# Altium PCB MicroerMouse.PcbDoc (part 1 of 2)
Units mm, origin at the board's own origin, x right, y up, seen from the top; angles counter-clockwise.
Board outline 87.5 x 72 mm, 2 copper layers (Top Layer, Bottom Layer); 98 components, 71 nets, 347 pads, 248 vias.
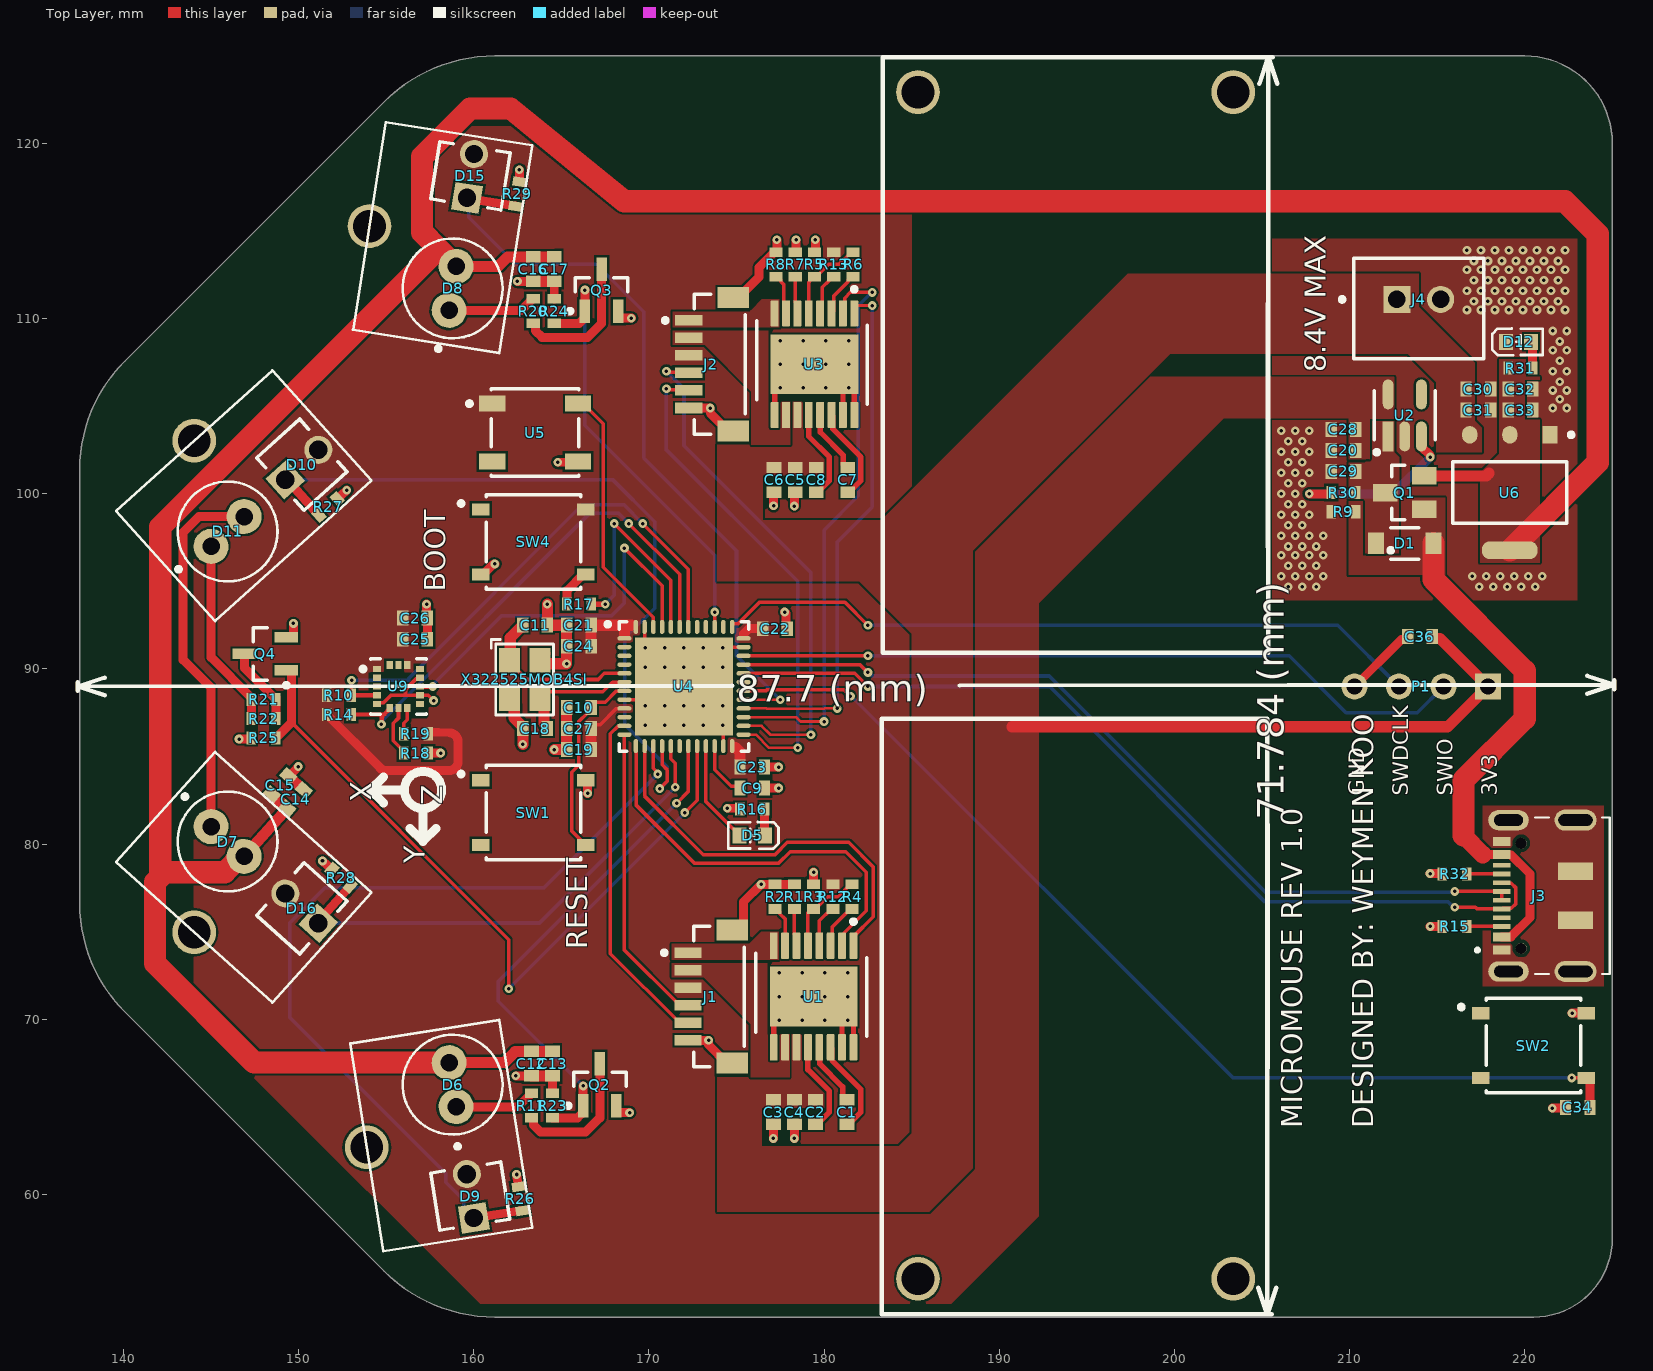
[diagram p0: Top Layer view]
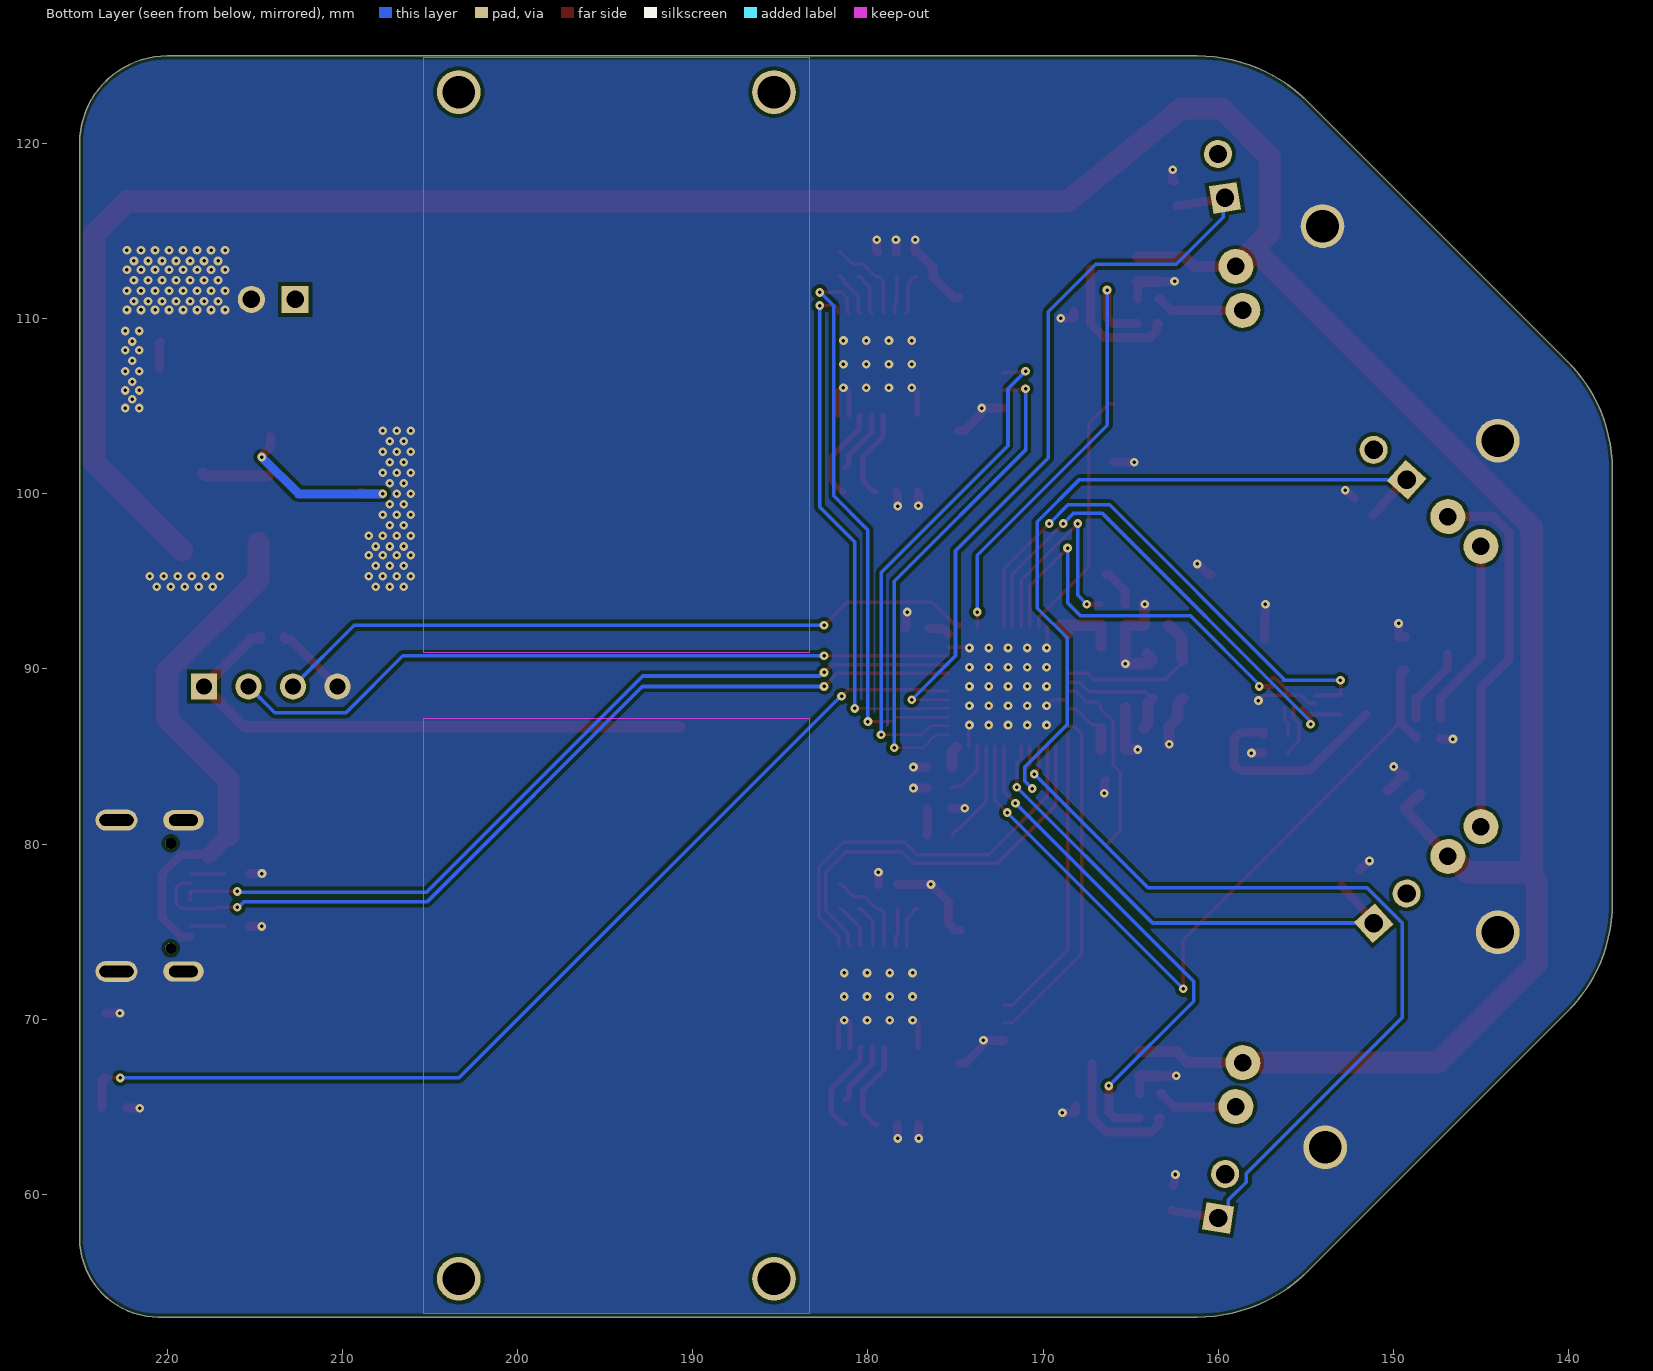
[diagram p1: Bottom Layer view, seen from below]

## Layer stack, top to bottom
Top Solder: solder mask 0.0102, Solder Resist, Dk 3.5
Top Layer: signal copper 0.0356
Dielectric 1: dielectric 0.32, FR-4, Dk 4.8
Bottom Layer: signal copper 0.0356
Bottom Solder: solder mask 0.0102, Solder Resist, Dk 3.5

## Board outline
225,120 225,57.5 cw(c220.5,57.5) 220.5,53 161.208,53 cw(c161.208,61.952) 154.878,55.622 140.061,70.439 cw(c146.243,76.621) 137.5,76.621 137.5,101.379 cw(c146.243,101.379) 140.061,107.561 154.878,122.378 cw(c161.208,116.048) 161.208,125 220,125 cw(c220,120)

## Design rules (kind name [scope] priority, off if disabled: settings)
BoardOutlineClearance [All] p1: gap=0.2 ignorepadtopadclearanceinfootprint=FALSE except(0.4: Arc-SplitBarrior Arc-SplitContinuation Track-SplitBarrior Track-SplitContinuation SMDPad-SplitBarrior SMDPad-SplitContinuation THPad-SplitBarrior THPad-SplitContinuation Via-SplitBarrior Via-SplitContinuation Fill-SplitBarrior Fill-SplitContinuation Poly-SplitBarrior Poly-SplitContinuation Region-SplitBarrior Region-SplitContinuation Text-SplitBarrior Text-SplitContinuation)
Clearance "Clearance Bottom Layer" [OnLayer('Bottom Layer')] p1: gap=0.203 ignorepadtopadclearanceinfootprint=TRUE except(0.076: Arc-SMDPad Track-SMDPad SMDPad-SMDPad; 0.254: Arc-Text Track-Text SMDPad-Text THPad-Text Via-Text Fill-Text Poly-Text Region-Text Text-Text)
Clearance "Clearance Top Layer" [OnLayer('Top Layer')] p2: gap=0.127 ignorepadtopadclearanceinfootprint=TRUE except(0.076: Arc-SMDPad Track-SMDPad SMDPad-SMDPad; 0.203: Arc-Arc Arc-Track Arc-THPad Arc-Via Arc-Hole Track-Track Track-THPad Track-Via Track-Hole SMDPad-THPad SMDPad-Via SMDPad-Hole THPad-THPad THPad-Via THPad-Hole Via-Via Via-Hole Fill-Hole Poly-Hole Region-Hole Text-Hole; 0.254: Arc-Text Track-Text SMDPad-Text THPad-Text Via-Text Fill-Text Poly-Text Region-Text Text-Text)
Clearance [All] p3: gap=0.2 ignorepadtopadclearanceinfootprint=FALSE except(0.076: Arc-SMDPad Track-SMDPad SMDPad-SMDPad; 0.089: Arc-Arc Arc-Track Track-Track; 0.127: Arc-Via Track-Via SMDPad-Via THPad-Via Via-Via; 0.254: Arc-Text Track-Text SMDPad-Text THPad-Text Via-Text Fill-Text Poly-Text Region-Text Text-Text)
DiffPairsRouting [All] p1: maxlimit=0.254 minlimit=0.127 mostfreqgap=0.203 toplayer_minwidth=0.254 toplayer_maxwidth=0.381 toplayer_prefwidth=0.254 bottomlayer_minwidth=0.254 bottomlayer_maxwidth=0.381 bottomlayer_prefwidth=0.254 maxuncoupledlength=12.7
HoleSize [All] p1: absolutevalues=TRUE maxlimit=6.3 minlimit=0.2 maxpercent=80.000 minpercent=20.000
MinimumAnnularRing [All] p1: minimumring=0.076
MinimumSolderMaskSliver [All] p1: minsoldermaskwidth=0.018
PolygonConnect PolygonConnect_1 [All] p1: connectstyle=Direct reliefconductorwidth=0.508 reliefentries=4 polygonreliefangle="90 Angle" airgapwidth=0.254
RoutingCorners [All] p1: cornerstyle=Round minsetback=2.54 maxsetback=2.54
RoutingVias [All] p1: holewidth=0.5 width=1 viastyle="Through Hole" minholewidth=0.2 minwidth=0.45 maxholewidth=1 maxwidth=2
SilkToSilkClearance [All] p1: silktosilkclearance=0.025
SilkToSolderMaskClearance [IsPad] p1: minsilkscreentomaskgap=0.025 clearancetoexposedcopper=TRUE
SolderMaskExpansion [All] p1: expansion=0.102 istentingtop=FALSE
Width [All] p1: maxlimit=2.54 minlimit=0.089 preferedwidth=0.381
24 further rules are at their usual default settings.

## Classes and differential pairs
net class USB: MCU_USB_D_N MCU_USB_D_P NetU4_31
differential pair MCU_USB_D: +MCU_USB_D_P -MCU_USB_D_N

## Components (designator, comment, footprint, x,y, rotation, side; value= is the part's Value field where it differs from the comment)
C1 "0.022uF" "IPC C C0603 No Silk" 181.3,64.7 r90 top value=?F
C2 "0.1uF" "IPC C C0603 No Silk" 179.5,64.7 r270 top value=?F
C3 "4.7uF" "IPC C C0603 No Silk" 177.1,64.7 r270 top value=?F
C4 "0.1uF" "IPC C C0603 No Silk" 178.3,64.7 r270 top value=?F
C5 "4.7uF" "IPC C C0603 No Silk" 178.35,100.8 r270 top value=?F
C6 "0.1uF" "IPC C C0603 No Silk" 177.15,100.8 r270 top value=?F
C7 "0.022uF" "IPC C C0603 No Silk" 181.35,100.8 r90 top value=?F
C8 "0.1uF" "IPC C C0603 No Silk" 179.55,100.8 r270 top value=?F
C9 "2.2uF" "IPC C C0603 No Silk" 175.9,83.2 r180 top value=?F
C10 "100nF" "IPC C C0603 No Silk" 166,87.8 r180 top value=?F
C11 "15pF" "IPC C C0603 No Silk" 163.5,92.5 r0 top value=?F
C12 "100nF" "IPC C C0603 No Silk" 163.294,67.47 r90 top value=?F
C13 "4.7uF" "IPC C C0603 No Silk" 164.494,67.47 r90 top value=?F
C14 "100nF" "IPC C C0603 No Silk" 149.832,82.57 r228 top value=?F
C15 "4.7uF" "IPC C C0603 No Silk" 148.941,83.372 r228 top value=?F
C16 "100nF" "IPC C C0603 No Silk" 163.394,112.83 r90 top value=?F
C17 "4.7uF" "IPC C C0603 No Silk" 164.594,112.83 r90 top value=?F
C18 "15pF" "IPC C C0603 No Silk" 163.5,86.6 r180 top value=?F
C19 "2.2uF" "IPC C C0603 No Silk" 166,85.4 r0 top value=?F
C20 "10uF" "IPC C C0603 No Silk" 209.65,102.475 r0 top value=?F
C21 "100nF" "IPC C C0603 No Silk" 166,92.5 r180 top value=?F
C22 "100nF" "IPC C C0603 No Silk" 177.2,92.3 r0 top value=?F
C23 "100nF" "IPC C C0603 No Silk" 175.9,84.4 r0 top value=?F
C24 "100nF" "IPC C C0603 No Silk" 166,91.3 r180 top value=?F
C25 "10uF" "IPC C C0603 No Silk" 156.65,91.7 r0 top value=?F
C26 "100nF" "IPC C C0603 No Silk" 156.65,92.9 r0 top value=?F
C27 "100nF" "IPC C C0603 No Silk" 166,86.6 r180 top value=?F
C28 "1uF" "IPC C C0603 No Silk" 209.65,103.675 r0 top value=?F
C29 "10uF" "IPC C C0603 No Silk" 209.65,101.275 r0 top value=?F
C30 "10uF" "IPC C C0603 No Silk" 217.35,105.975 r0 top value=?F
C31 "100nF" "IPC C C0603 No Silk" 217.35,104.775 r0 top value=?F
C32 "10uF" "IPC C C0603 No Silk" 219.75,105.975 r0 top value=?F
C33 "100nF" "IPC C C0603 No Silk" 219.75,104.775 r0 top value=?F
C34 "100nF" "IPC C C0603 No Silk" 223.025,64.975 r180 top value=?F
C36 "100nF" "IPC C C0603 No Silk" 214.015,91.85 r180 top value=?F
D1 "MBR0540" FP-425-04-MFG 213.15,97.175 r0 top
D5 "LED" LED0603-FD_BLUE 175.9,80.5 r0 top
D6 "SFH 4545" FP-SFH_4556-MFG 158.794,66.27 r99 top
D7 "SFH 4545" FP-SFH_4556-MFG 145.944,80.15 r318 top
D8 "SFH 4545" FP-SFH_4556-MFG 158.794,111.73 r81 top
D9 "TEFT4300" FP-6_544-5269_01-4-MFG 159.801,59.909 r99 top
D10 "TEFT4300" FP-6_544-5269_01-4-MFG 150.18,101.664 r42 top
D11 "SFH 4545" FP-SFH_4556-MFG 145.944,97.85 r42 top
D12 "LED" LED0603-FD_BLUE 219.65,108.675 r180 top
D15 "TEFT4300" FP-6_544-5269_01-4-MFG 159.811,118.15 r81 top
D16 "TEFT4300" FP-6_544-5269_01-4-MFG 150.183,76.333 r138 top
J1 "BM06B-SRSS-TBT(LF)(SN)" FP-BM06B-SRSS-TBT_LF_SN-MFG 174,71.3 r270 top
J2 "BM06B-SRSS-TBT(LF)(SN)" FP-BM06B-SRSS-TBT_LF_SN-MFG 174.05,107.4 r270 top
J3 "DX07S016JA1R1500" JAE_DX07S016JA1R1500 219.8,77.05 r90 top
J4 "B2B-XH-A(LF)(SN)" FP-B2B-XH-A_LF_SN-MFG 213.95,110.575 r0 top
P1 "Header 4H" HDR1X4H 217.9,89 r180 top
Q1 "FDV304P" FAIR-SOT23-3_V 213.15,100.075 r180 top
Q2 "2N7002" INF-PG-SOT23_M 167.194,66.27 r90 top
Q3 "2N7002" INF-PG-SOT23_M 167.294,111.63 r90 top
Q4 "2N7002" INF-PG-SOT23_M 148.1,90.865 r180 top
R1 "2.49k" "IPC C R0603 No Silk" 178.3,77 r270 top value=?
R2 "20k" "IPC C R0603 No Silk" 177.2,77 r270 top value=?
R3 "0" "IPC C R0603 No Silk" 179.4,77 r90 top value=?
R4 "10k" "IPC C R0603 No Silk" 181.6,77 r90 top value=?
R5 "0" "IPC C R0603 No Silk" 179.45,113.1 r90 top value=?
R6 "10k" "IPC C R0603 No Silk" 181.65,113.1 r90 top value=?
R7 "2.49k" "IPC C R0603 No Silk" 178.35,113.1 r270 top value=?
R8 "20k" "IPC C R0603 No Silk" 177.25,113.1 r270 top value=?
R9 "100k" "IPC C R0603 No Silk" 209.65,98.975 r0 top value=?
R10 "2.2k" "IPC C R0603 No Silk" 152.3,88.5 r180 top value=?
R11 "10R" "IPC C R0603 No Silk" 163.294,65.07 r90 top value=?
R12 "10k" "IPC C R0603 No Silk" 180.5,77 r270 top value=?
R13 "10k" "IPC C R0603 No Silk" 180.55,113.1 r270 top value=?
R14 "2.2k" "IPC C R0603 No Silk" 152.3,87.4 r180 top value=?
R15 "Generic RES 0603" "IPC C R0603 No Silk" 216,75.3 r0 top value=5.1k
R16 "1k" "IPC C R0603 No Silk" 175.9,82 r0 top value=?
R17 "10k" "IPC C R0603 No Silk" 166,93.7 r0 top value=?
R18 "10k" "IPC C R0603 No Silk" 156.7,85.2 r180 top value=?
R19 "10k" "IPC C R0603 No Silk" 156.7,86.3 r180 top value=?
R20 "10R" "IPC C R0603 No Silk" 163.394,110.43 r90 top value=?
R21 "5.6R" "IPC C R0603 No Silk" 148,88.265 r0 top value=?
R22 "5.6R" "IPC C R0603 No Silk" 148,87.165 r0 top value=?
R23 "4.7k" "IPC C R0603 No Silk" 164.494,65.07 r270 top value=?
R24 "4.7k" "IPC C R0603 No Silk" 164.594,110.43 r270 top value=?
R25 "4.7k" "IPC C R0603 No Silk" 148,86.065 r0 top value=?
R26 "1.8k" "IPC C R0603 No Silk" 162.66,59.756 r279 top value=?
R27 "1.8k" "IPC C R0603 No Silk" 151.682,99.248 r222 top value=?
R28 "1.8k" "IPC C R0603 No Silk" 152.429,78.079 r318 top value=?
R29 "1.8k" "IPC C R0603 No Silk" 162.482,117.119 r261 top value=?
R30 "10k" "IPC C R0603 No Silk" 209.65,100.075 r180 top value=?
R31 "1k" "IPC C R0603 No Silk" 219.75,107.175 r180 top value=?
R32 "Generic RES 0603" "IPC C R0603 No Silk" 216,78.3 r0 top value=5.1k
SW1 "Reset" FP-PTS526SK15SMTR2LFS-MFG 163.4,81.8 r0 top
SW2 "Reset" FP-PTS526SK15SMTR2LFS-MFG 220.5,68.5 r0 top
SW4 "DFU_Boot" FP-PTS526SK15SMTR2LFS-MFG 163.4,97.25 r0 top
U1 "DRV8874PWPR" FP-PWP0016J-MFG 179.4,71.3 r270 top
U2 "AP2112K-3.3TRG1" FP-SOT25-IPC_A 213.15,104.475 r90 top
U3 "DRV8874PWPR" FP-PWP0016J-MFG 179.45,107.4 r270 top
U4 "STM32F411CEU6" STM-UFQFPN48_L 172,89 r0 top
U5 "1655" ADA-RGB-1655_V 163.5,103.5 r0 top
U6 "ams1117" FP-ams1117-IPC_C 219.15,100.075 r270 top
U9 "LIS3DHTR" FP-LGA-16-7983231-MFG 155.7,89 r0 top
X322525MOB4SI "25Mhz" OSC-SMD_4P-L3.2-W2.5-BL 162.9,89.4 r270 top value=25MHz

## Footprints (in the part's own frame and the unit in brackets; to place one, negate y for a bottom-side part, rotate by r counter-clockwise, add the part's x,y. Pads: shape width x height; smd on the part's side, far side on the other; paste and mask are expansions set on the pad)
ADA-RGB-1655_V [mm] "SMD, 4-Leads, Body 5x5mm"
  rect 1.5x0.9 smd: 1(-2.45,1.65) 2(-2.45,-1.65) 3(2.45,-1.65) 4(2.45,1.65)
  silkscreen extent -3.87,-2.5 2.5,2.5, body extent -2.7,-2.5 2.7,2.5, height 1.68
FAIR-SOT23-3_V [mm] "SOT23, 3-Leads, Body 3.12x1.5mm, Pitch 0.95mm"
  rect 1.4x1 smd: 1(-1.1,0.95) 2(-1.1,-0.95) 3(1.1,0)
  silkscreen extent -0.01,-1.55 0.75,1.55, body extent -1.35,-1.56 1.35,1.56, height 1.2
FP-6_544-5269_01-4-MFG [mm]
  rect 1.6x1.6 hole 1.05 paste-2539.97 mask+0: 1(-1.27,0)
  round 1.6 hole 1.05 paste-2539.97 mask+0: 2(1.27,0)
  silkscreen extent -1.65,-2.03 1.65,2.02, body extent -2.17,-2.13 2.17,2.13, height 0.25
FP-425-04-MFG [mil]
  rect 36x48 smd paste+0 mask+0: 1(-64.5,0) 2(64.5,0)
  silkscreen extent -36,-35 32,35, body extent -86,-39 86,39, height 10
FP-ams1117-IPC_C [mm]
  rect 1.004x0.872 smd paste+0 mask+0: 1(-3.295,2.29)
  rrect100% 1.004x0.872 smd paste+0 mask+0: 2(-3.295,0) 3(-3.295,-2.29)
  rrect87% 1.004x3.182 smd paste+0 mask+0: 4(3.295,0)
  silkscreen extent -3.42,-3.25 1.75,3.63, body extent -3.9,-3.35 3.9,3.35, height 0.25
FP-B2B-XH-A_LF_SN-MFG [mm]
  rect 1.55x1.55 hole 1 paste-2539.97 mask+0: 1(-1.25,0.525)
  round 1.55 hole 1 paste-2539.97 mask+0: 2(1.25,0.525)
  silkscreen extent -4.5,-2.88 3.7,2.88, body extent -3.8,-2.98 3.8,2.98, height 0.25
FP-BM06B-SRSS-TBT_LF_SN-MFG [mm]
  rect 0.6x1.55 smd paste+0 mask+0: 1(-2.5,-1.775) 2(-1.5,-1.775) 3(-0.5,-1.775) 4(0.5,-1.775) 5(1.5,-1.775) 6(2.5,-1.775)
  rect 1.2x1.8 smd paste+0 mask+0: 7(-3.8,0.75) 8(3.8,0.75)
  silkscreen extent -4,-3.25 4,1.45, body extent -4.5,-2.65 4.5,1.75, height 0.25
FP-LGA-16-7983231-MFG [mm]
  rect 0.45x0.35 smd paste-1000 mask+0: 1(-1.225,1) 2(-1.225,0.5) 3(-1.225,0) 4(-1.225,-0.5) 5(-1.225,-1) 9(1.225,-1) 10(1.225,-0.5) 11(1.225,0) 12(1.225,0.5) 13(1.225,1)
  rect 0.35x0.45 smd paste-1000 mask+0: 6(-0.5,-1.225) 7(0,-1.225) 8(0.5,-1.225) 14(0.5,1.225) 15(0,1.225) 16(-0.5,1.225)
  silkscreen extent -2.15,-1.58 1.58,1.58, body extent -2.07,-2.07 2.07,2.07, height 0.25
FP-PTS526SK15SMTR2LFS-MFG [mm]
  rect 1x0.7 smd paste+0 mask+0: 1(-3,1.85) 2(3,1.85) 3(-3,-1.85) 4(3,-1.85)
  silkscreen extent -4.25,-2.7 2.7,2.7, body extent -3.6,-2.8 3.6,2.8, height 0.25
FP-PWP0016J-MFG [mm]
  rrect22% 1.5x0.45 smd paste+0 mask+0: 1(-2.9,2.275) 2(-2.9,1.625) 3(-2.9,0.975) 4(-2.9,0.325) 5(-2.9,-0.325) 6(-2.9,-0.975) 7(-2.9,-1.625) 8(-2.9,-2.275) 9(2.9,-2.275) 10(2.9,-1.625) 11(2.9,-0.975) 12(2.9,-0.325) 13(2.9,0.325) 14(2.9,0.975) 15(2.9,1.625) 16(2.9,2.275)
  rect 3.4x5 smd paste-1000 mask-1000: 17(0,0)
  silkscreen extent -4.4,-3.3 2.27,3.03, body extent -3.75,-2.8 3.75,2.8, height 0.25
FP-SFH_4556-MFG [mm]
  round 2 hole 1 paste-2539.97 mask+0: 1(-1.27,0) 2(1.27,0)
  silkscreen extent -3.65,-2.85 2.85,2.85, body extent -2.95,-2.95 2.95,2.95, height 0.25
FP-SOT25-IPC_A [mm]
  rect 1.707x0.616 smd paste+0 mask+0: 1(-1.201,0.95)
  rrect100% 1.707x0.616 smd paste+0 mask+0: 2(-1.201,0) 3(-1.201,-0.95) 4(1.201,-0.95) 5(1.201,0.95)
  silkscreen extent -2.22,-1.75 1.4,1.75, body extent -2.55,-2 2.55,2, height 0.25
HDR1X4H [mm] "Connector; Header; 4 Position; Right Angle"
  rect 1.5x1.5 hole 0.9: 1(0,0)
  round 1.5 hole 0.9: 2(2.54,0) 3(5.08,0) 4(7.62,0)
INF-PG-SOT23_M [mm] "SOT23, 3-Leads, Body 2.9x1.3mm, Pitch 0.95mm, IPC Low Density"
  rect 1.35x0.6 smd: 1(-1.2,0.95) 2(-1.2,-0.95) 3(1.2,0)
  silkscreen extent -1.32,-1.5 0.7,1.92, body extent -0.7,-1.5 0.7,1.5, height 1.1
"IPC C C0603 No Silk" [mm] "Chip Capacitor, 2-Leads, Body 1.60x0.80mm, IPC High Density"
  rect 0.65x0.85 smd: 1(-0.7,0) 2(0.7,0)
  body extent -0.8,-0.4 0.8,0.4, height 0.8
"IPC C R0603 No Silk" [mm] "Chip Resistor, 2-Leads, Body 1.60x0.80mm, IPC High Density"
  rect 0.55x0.75 smd: 1(-0.7,0) 2(0.7,0)
  body extent -0.8,-0.4 0.8,0.4, height 0.4
JAE_DX07S016JA1R1500 [mm]
  rect 0.52x1 smd: 1(-3.1,1.1) 2(-2.35,1.1) 11(2.35,1.1) 12(3.1,1.1)
  rect 0.27x1 smd: 3(-1.75,1.1) 4(-1.25,1.1) 5(-0.75,1.1) 6(-0.25,1.1) 7(0.25,1.1) 8(0.75,1.1) 9(1.25,1.1) 10(1.75,1.1)
  rect 1x2 smd: S1(-1.4,-3.1) S2(1.4,-3.1)
  oval 1.158x2.316 hole 0.65 slot 1.65 at 90 deg: S3(-4.32,0.725) S4(4.32,0.725)
  oval 1.2x2.4 hole 0.65 slot 1.95 at 90 deg: S5(-4.32,-3.1) S6(4.32,-3.1)
  round 0.63 hole 0.63 unplated: ""(-3,0) ""(3,0)
  round 0.6 hole 0.6 unplated: ""(3,0)
  silkscreen extent -4.47,-5.05 4.47,2.6
LED0603-FD_BLUE [mm]
  rect 0.8x0.9 smd mask+0.051: 1(-0.72,0) 2(0.72,0)
  silkscreen extent -1.38,-0.76 1.5,0.76
OSC-SMD_4P-L3.2-W2.5-BL [mm]
  rect 1.4x1.2 smd mask+0.051: 1(-1.1,-0.875) 2(1.1,-0.875) 3(1.1,0.875) 4(-1.1,0.875)
  silkscreen extent -2.29,-1.9 2.03,1.65
STM-UFQFPN48_L [mm] "QFN, 48-Leads, Body 7.1x7.1mm, Pitch 0.5mm, Thermal Pad 5.6x5.6mm, IPC High Density"
  oval 0.8x0.25 smd: 1(-3.4,2.75) 2(-3.4,2.25) 3(-3.4,1.75) 4(-3.4,1.25) 5(-3.4,0.75) 6(-3.4,0.25) 7(-3.4,-0.25) 8(-3.4,-0.75) 9(-3.4,-1.25) 10(-3.4,-1.75) 11(-3.4,-2.25) 12(-3.4,-2.75) 25(3.4,-2.75) 26(3.4,-2.25) 27(3.4,-1.75) 28(3.4,-1.25) 29(3.4,-0.75) 30(3.4,-0.25) 31(3.4,0.25) 32(3.4,0.75) 33(3.4,1.25) 34(3.4,1.75) 35(3.4,2.25) 36(3.4,2.75)
  oval 0.25x0.8 smd: 13(-2.75,-3.4) 14(-2.25,-3.4) 15(-1.75,-3.4) 16(-1.25,-3.4) 17(-0.75,-3.4) 18(-0.25,-3.4) 19(0.25,-3.4) 20(0.75,-3.4) 21(1.25,-3.4) 22(1.75,-3.4) 23(2.25,-3.4) 24(2.75,-3.4) 37(2.75,3.4) 38(2.25,3.4) 39(1.75,3.4) 40(1.25,3.4) 41(0.75,3.4) 42(0.25,3.4) 43(-0.25,3.4) 44(-0.75,3.4) 45(-1.25,3.4) 46(-1.75,3.4) 47(-2.25,3.4) 48(-2.75,3.4)
  rect 5.6x5.6 smd: 49(0,0)
  silkscreen extent -4.47,-3.7 3.7,3.7, body extent -3.55,-3.55 3.55,3.55, height 0.6

## Part data
C1 C3 C4 C5 C6 C7 C9 C10 C11 C12 C13 C14 C15 C16 C17 C18 C19 C20 C21 C22 C23 C24 C25 C26 C27 C28 C29 C30 C31 C32 C33 C34 C36: library part CMP-026-000001-1, Add into BOM=yes, Convert to PCB=yes, Design Item ID="Generic CAP 0603", Source=Schlib1.SchLib, Supplier Footprint=0402
C2 C8: library part CMP-026-000001-1, "16V rated", Add into BOM=yes, Convert to PCB=yes, Design Item ID="Generic CAP 0603", Source=Schlib1.SchLib, Supplier Footprint=0402
D1: library part CMP-2000-05114-2, "DIODE SCHOTTKY 40V 500MA SOD123", Average Rectified Current=500mA, Current Rating=500A, Forward Voltage=620mV, Max Forward Surge Current (Ifsm)=5.5A, Max Operating Temperature=125°C, Max Repetitive Reverse Voltage (Vrrm)=40V, Max Reverse Leakage Current=20uA, Min Operating Temperature=-65°C, Package Quantity=3000, Power Dissipation=400mW, Contact Plating=Tin, Element Configuration=Single, Forward Current=500mA, Height=1.03mm, Lead Free="Lead Free", Length=2.7mm, Max Reverse Voltage (DC)=40V, Max Surge Current=5.5A, Mount="Surface Mount", Number of Pins=2, Output Current=500mA, Packaging="Tape and Reel", Peak Non-Repetitive Surge Current=5.5A, Peak Reverse Current=20uA, Polarity=Standard, Radiation Hardening=No, REACH SVHC="No SVHC", Voltage Rating (DC)=40V, Weight=0.03g, Width=1.6mm
D5 D12: library part CMP-030-000001-1, Add into BOM=yes, Convert to PCB=yes, Design Item ID="Generic LED 0603", Source=Schlib1.SchLib, Supplier Footprint=0603
D6 D7 D8 D11: library part CMP-62016-000017-1, "EMITTER IR 860NM 100MA RADIAL", Colour=Infrared, Forward Current=100mA, Forward Voltage=1.5V, Manufacturer="Osram Opto", Manufacturer Part Number="SFH 4556", Reverse Voltage=12V, Temperature="-40°C to +100°C", Temperature Range High=+100°C, Temperature Range Low=-40°C, Automotive=No, Category=Diode, ComponentLink2Description=Datasheet, ComponentLink2URL=https://dammedia.osram.info/media/resource/hires/osram-dam-2496340/SFH%204556.pdf, Device Class L1=Optoelectronics, Device Class L2=LEDs, Device Class L3=unset, Digikey Description="EMITTER IR 860NM 100MA RADIAL", Lead Free=Yes, Led Orientation=Straight, Mouser Description="SFH 4556 Osram Opto, 860nm IR LED, 5mm (T-1 3/4) Through Hole package", Octopart=https://octopart.com/sfh+4556-osram+opto-31094094, Package="SFH 4556", Peak Emmision Wavelength=860nm, RoHS=TRUE, Viewing Angle=40°
D9 D10 D15 D16: library part CMP-00030-39729854-1, "TEFT4300 PHOTOTRANSISTOR 3.0MM WIDE VIEW / Phototransistor IR Chip Silicon 925nm 2-Pin T-1", Case/Package=T, Collector Emitter Breakdown Voltage=70V, Collector Emitter Saturation Voltage=300mV, Dark Current=200nA, Max Collector Current=50mA, Max Operating Temperature=100°C, Max Power Dissipation=100mW, Min Operating Temperature=-40°C, Collector Emitter Voltage (VCEO)=70V, Fall Time=2.3µs, Height=4.5mm, Lead Free="Lead Free", Length=3.2mm, Lens Style=Domed, Mount="Through Hole", NexarPartId=39729854, Number of Channels=1, Number of Elements=1, Number of Pins=2, Orientation="Top View", Polarity=NPN, Power Consumption=100mW, Power Dissipation=100mW, Radiation Hardening=No, REACH SVHC=Unknown, Rise Time=2µs, RoHS=Compliant, Schedule B="8541407080, 8541407080", Viewing Angle=30°, Wavelength=925nm, Width=3.9mm
J1 J2: library part CMP-17439-000255-1, "CONN HEADER SMD 6POS 1MM", Color=Natural, Contact Resistance=20mR, Current Rating=1A, Flammability Rating="UL94 V-0", Insulation Resistance=100MR, Max Operating Temperature=85°C, Max Voltage Rating (AC)=50V, Min Operating Temperature=-25°C, Package Quantity=1, Connector Type=Header, Contact Finish - Mating=TIN, Contact Material="Copper Alloy", Contact Plating=Tin, Contact Shape=Square, Contact Type="Male Pin", Depth=3.6mm, Fastening Type=Pull, Gender=Male, Housing Color=Natural, Housing Material=Polyamide, Insulation Color=Natural, Insulation Material=Nylon, Lead Free="Lead Free", Length=8mm, Mated Stacking Heights=4.9mm, Material=Polyamide, Max Current Rating=1A, Max Voltage Rating (DC)=50V, Mount="Surface Mount", Number of Positions=6, Number of Rows=1, Orientation=Straight, Packaging="Tape and Reel", Pitch=1mm, Series=SR, Termination=Solder, Voltage Rating=50V
J3: library part CMP-044-000001-1, "USB-C (USB TYPE-C) USB 2.0 Receptacle Connector 24 (16+8 Dummy) Position Surface Mount, Right Angle; Through Hole", Package=None, Availability=Unavailable, Component Type=Standard, Design Item ID=DX07S016JA1R1500, MP=DX07S016JA1R1500, Pin Count=18, Price=None, Source=DX07S016JA1R1500.SchLib
J4: library part CMP-2000-05888-3, "CONN HEADER VERT 2POS 2.5MM", Color=Natural, Contact Resistance=20mR, Current Rating=3A, Housing Color=White, Insulation Resistance=1GR, Max Operating Temperature=85°C, Max Voltage Rating (AC)=250V, Min Operating Temperature=-25°C, Connector Type="Male Pin", Contact Material=Brass, Contact Plating=Tin, Contact Type="Male Pin", Depth=5.75mm, Fastening Type=Detent, Housing Material=Polyamide, Lead Free="Lead Free", Lead Pitch=2.5mm, Length=7.4mm, Max Current Rating=3A, Max Voltage Rating (DC)=250V, Mount="Through Hole", Number of Contacts=2, Number of Positions=2, Number of Rows=1, Orientation=Straight, Packaging=Bulk, Pitch=2.5mm, REACH SVHC="No SVHC", Series=XH, Termination=Solder, Voltage Rating=250V, Voltage Rating (AC)=250V, Wire/Cable Gauge=22AWG
P1: library part CMP-007-000098-1, "Header, 4-Pin, Right Angle", Component Type=Standard, Design Item ID="Header 4H", LatestRevisionDate=17-Jul-2002, LatestRevisionNote="Re-released for DXP Platform.", Pin Count=4, Publisher="Altium Limited", Source="Miscellaneous Connectors.SchLib"
Q1: library part CMP-2000-06263-1, "P-Channel Digital FET, -25 V, -0.46 A, 0.35 W, -55 to 150 degC, 3-Pin SOT-23, -55 to 150 degC, RoHS, Tape and Reel", Manufacturer=FairchildSemiconductor, Maximum Continuous Drain Current=0.46A, Maximum Drain Source Voltage=25V, Maximum Gate Source Voltage=8V, Operating Temperature=-55to150°C, Package=3SOT-23, Package Description="3-Pin Small Outline Transistor, Body 2.92 x 1.325 mm, Pitch 0.95 mm", Package Reference=SOT23-3, Package Version="Rev. 12, 03/2016", Category=MOSFET, Channel Mode=Enhancement, Channel Type=P, Datasheet URL=https://www.fairchildsemi.com/datasheets/FD/FDV304P.pdf, Datasheet Version="Rev. E1, 08/1997", Manufacturer URL=https://www.fairchildsemi.com/, Mounting=SurfaceMount, Mounting Technology=SurfaceMount, Package URL=http://www.fairchildsemi.com/dwg/MA/MA03D.pdf, Packaging=Tape&Reel, Rad Hard=No, RDS-on=1100@4.5VmOhm, Typical Fall Time=35ns, Typical Rise Time=8ns, Typical Turn-Off Delay Time=55ns, Typical Turn-On Delay Time=6ns
Q2 Q3 Q4: library part CMP-1149-00026-1, "N-Channel OptiMOS Small-Signal-Transistor, 60 V VDS, 0.3 A ID, -55 to 150 degC, PG-SOT23, Reel, Green", Manufacturer=Infineon, ComponentLink1Description="Manufacturer URL", ComponentLink1URL=http://www.infineon.com/, ComponentLink2Description=Datasheet, ComponentLink2URL=http://www.infineon.com/dgdl/2N7002_Rev2.4.pdf?folderId=db3a3043156fd573011622e10b5c1f67&fileId=db3a304319bc939a0119c2a9461e79e6, ComponentLink3Description="Package Specification", ComponentLink3URL=http://www.infineon.com/dgdl/SOT23-Package_Overview.pdf?folderId=db3a30431936bc4b0119532290053c66&fileId=db3a30431936bc4b0119533468123c85, DatasheetVersion="Rev. 2.4", Green=TRUE, Halogen-free=TRUE, ID (max)="0.3Â A", IDpuls (max)="1.2Â A", Mounting Technology="Surface Mount", PackageDescription="3-Pin Small Outline Transistor Package, 2.9 x 1.3 mm Body, 0.95 mm Pitch", PackageReference=PG-SOT23, PackageVersion=Apr-08, Packing=Reel, PartNumber=2N7002, Ptot (max)="0.5Â W", QG="0.4Â nC", RDS (on) (max)="3,000 mOhm", RDS (on) (max) (@4.5V)="4,000 mOhm", RthJA (max)="250 K/W", VDS (max)="60 V", VGS(th) (max)="2.5Â V", VGS(th) (min)="1.5Â V"
R1 R2 R3 R4 R5 R6 R7 R8 R9 R10 R11 R12 R13 R14 R15 R16 R17 R18 R19 R20 R21 R22 R23 R24 R25 R26 R27 R28 R29 R30 R31 R32: library part CMP-032-000001-1, Add into BOM=yes, Convert to PCB=yes, Design Item ID="Generic RES 0603", Source=Schlib1.SchLib, Supplier Footprint=0402
SW1 SW2 SW4: library part CMP-10040-000013-1, "TACT 5.2 X 5.2, 1.5 MM H, 260GF,", Contact Current Rating=50mA, Contact Resistance=100mΩ, Manufacturer=C&K, Manufacturer Part Number=PTS526SK15SMTR2LFS, Operating Force=250gf, Temperature="-20°C to +70°C", Temperature Range High=+70°C, Temperature Range Low=-20°C, Voltage Rating Dc=12V, Automotive=No, Category=Switch, ComponentLink2Description=Datasheet, ComponentLink2URL=https://www.ckswitches.com/media/2780/pts526.pdf, Device Class L1=Electromechanical, Device Class L2=Switches, Device Class L3="Tactile Switches", Digikey Description="TACT 5.2 X 5.2, 1.5 MM H, 260GF,", Electromechanical Life=200000Cycles, Height=1.65mm, Lead Free=Yes, Octopart=https://octopart.com/pts526+sk15+smtr2+lfs-c%26k+components-100617999, Package=PTS526SK15SMTR2LFS, RoHS=TRUE, Standoff Height=0mm, Throw Configuration=SPST-NO
U1 U3: library part CMP-04915-000011-1, "DRV8874 H-BRIDGE MOTOR DRIVER", RoHS Compliant=Yes
U2: library part CMP-12756-000035-1, "IC REG LINEAR 3.3V 600MA SOT25", Case/Package=SOT-23-5, Dropout Voltage=250mV, Max Input Voltage=6V, Max Operating Temperature=85°C, Max Output Current=600mA, Min Input Voltage=2.5V, Min Operating Temperature=-40°C, Output Voltage=3.3V, Package Quantity=1, Quiescent Current=55uA, Accuracy=1.5%, Height=1.3mm, Lead Free="Lead Free", Length=3.1mm, Mount="Surface Mount", Number of Outputs=1, Number of Pins=5, Number of Regulators=1, Output Current=600mA, Output Type=Fixed, Packaging="Tape and Reel", Polarity=Positive, Width=1.7mm
U4: library part CMP-0243-00165-1, "ARM Cortex-M4 32-bit MCU+FPU, 512 KB Flash, 128 KB RAM, 36 I/Os, 48-Pin UFQFPN, -40 to 85 degC, Tray", I/Os (High Current)=36, Operating Frequency(F) (Processor speed) (MHz)=100, Package Description=UFQFPN48, Package Reference="48-Pin Ultra Thin Fine Pitch Quad Flat No-Lead, 7 x 7 x 0.6 mm Body, 0.5 mm Pitch, Exposed Pad", Supply Voltage(Vcc) min (V)=1.7, ComponentLink1Description="Manufacturer URL", ComponentLink1URL=http://www.st.com/, ComponentLink2Description=Datasheet, ComponentLink2URL=http://www.st.com/st-web-ui/static/active/en/resource/technical/document/datasheet/DM00115249.pdf, Core="ARM Cortex-M4", DatasheetVersion="Rev. 6", FLASH Size (Prog) (kB)=512, Internal RAM Size (kB)=128, Mounting Technology="Surface Mount", Packing=Tray
U5: library part CMP-2000-05026-1, "Intelligent Control LED Integrated Light Source, 3.5 to 5.3 V, -25 to 80 degC, 4-Pin SMD, RoHS, Tape and Reel", Color=Red,Green,Blue(RGB), Manufacturer=Adafruit-Industries-LLC, Package Description="4-Pin Surface Mount Device, Body 5 x 5 mm", Category=Optoelectronics, Configuration=Discrete, Controller Type=-, Datasheet URL=http://datasheet.octopart.com/ADA1655-Adafruit-Industries-datasheet-32028139.pdf, Datasheet Version=May-13, Family=Addressable,Specialty, Interface=-, Manufacturer URL=https://www.adafruit.com/, Mounting Type=SurfaceMount, Number of LEDs=10, Package Reference=1655, Series=Neopixel, Size / Dimension=5.00mmLx5.00mmW, Utilized LED=WS2812(5050)
U6: library part CMP-209535-000002-1, "1A LOW DROPOUT VOLTAGE REGULATOR", RoHS Compliant=Yes
U9: library part CMP-0234-00055-6, "ACCEL 2-16G I2C/SPI 16LGA", Case/Package=LGA, Max Operating Temperature=85°C, Max Supply Voltage=3.6V, Min Operating Temperature=-40°C, Min Supply Voltage=1.71V, Operating Supply Current=11uA, Operating Supply Voltage=2.5V, Package Quantity=1, Axis="X, Y, Z", Bandwidth=5kHz, Contact Plating=Gold, Depth=3mm, Height=1mm, Interface=I2C, Lead Free="Lead Free", Length=3mm, Max Supply Voltage (DC)=3.6V, Min Supply Voltage (DC)=1.71V, Number of Pins=16, Output Type=Digital, Packaging="Tape and Reel", Radiation Hardening=No, REACH SVHC="No SVHC", Resolution=16b, RoHS Compliant=Yes, Sensor Type="3 Axis", Series=-, Width=3mm
X322525MOB4SI: library part "Crystal 25MHz X322525MOB4SI", "Crystal Type:SMD Crystal Resonator Frequency: Frequency Tolerance:±10ppm Frequency Tolerance:±10ppm Frequency Stability:±30ppm Frequency Stability:±30ppm Load Capacitance: Operating Temperature: Operating Temperature:", Frequency Stability=±30ppm, Frequency Tolerance=±10ppm, JLCPCB Part Class="Basic Part", LCSC Part Name="25MHz ±10ppm 12pF", Manufacturer=YXC(扬兴晶振), Manufacturer Part=X322525MOB4SI, Add into BOM=yes, Convert to PCB=yes, Crystal Type="SMD Crystal Resonator", Datasheet=https://atta.szlcsc.com/upload/public/pdf/source/20210329/C112971_1F611BDC486E193C1706F6D8EB5AA189.pdf, Device=X322525MOB4SI, Supplier=LCSC, Supplier Footprint=SMD3225-4P, Supplier Part=C9006, Symbol=X322525MOB4SI

## Free pads (board coordinates)
  round 2.5 hole 1.86: 2(144.037,74.967) 2(144.037,103.033) 2(153.891,62.689) 2(154.045,115.287) 2(185.36,55.184) 2(185.36,122.934) 2(203.36,55.184) 2(203.36,122.934)

## Via types
v1: diameter 0.5, hole 0.2, Top Layer to Bottom Layer, tented both sides, 199 vias
v2: diameter 0.5, hole 0.2, Top Layer to Bottom Layer, 49 vias

## Nets (pads, with @x,y where several pads share a name; then routed paths per layer and width w, separated by ;. In a path a pad name is that pad's centre, name@x,y a point inside that pad or via, vN(x,y) a via of type N, cw(c..) or ccw(c..) an arc to the next point about the centre after c; other vN are vias at no path point)
3V3: C19.2 C20.2 C21.1 C22.1 C23.1 C24.1 C25.1 C26.1 C27.1 C28.2 C36.1 D9.2 D10.2 D15.2 D16.2 J1.3 J2.3 P1.1 R10.2 R12.1 R13.1 R14.2 R19.1 SW4.2 U2.5 U4.1 U4.9 U4.24 U4.36 U4.48 U5.1 U9.1 U9.14 | length 54.8
  Top Layer w0.203: C27.1 166.911,86.811 167.211,86.811 168.141,87.741 168.591,87.741 U4.9
  Top Layer w0.508: R14.2 154.651,84.349 ; R19.1 R19.1@157.421,86.299 ; R19.1@157.421,86.399 158.609,86.359 cw(c158.592,85.852) 159.1,85.852 159.1,84.71 cw(c158.592,84.71) 158.952,84.352 158.948,84.348 cw(c158.59,84.708) 158.59,84.2 155.01,84.2 cw(c155.01,84.708) 154.652,84.348 ; 175.4,92 175.7,92.3 C22.1 ; 154.651,84.349 154.652,84.348
  Top Layer w0.635: C19.2 C27.1 ; C24.1 C21.1 168.6,92.5 ; 168.6,92 168.6,92.5 ; 169,92.5 168.6,92.5 ; 174.942,85.517 175.192,85.267 175.192,84.407 C23.1 ; 190.734,86.7 215.6,86.7 P1.1 215.158,91.742 214.723,91.742 214.715,91.75 C36.1
5V: C12.2 C13.2 C14.2 C15.2 C16.2 C17.2 C32.1 C33.1 D6.2 D7.2 D8.2 Q1.2 R31.2 U6.2 U6.4 | length 190.6
  Top Layer w0.635: D7.2 C14.2 C15.2 ; D6.2@158.794,67.54 161.74,67.54 162.37,68.17 C12.2 C13.2 ; D8.2 161.384,112.984 161.93,113.53 C16.2 C17.2 ; Q1.2 217.8,101.025 217.95,101.175
  Top Layer w1.27: D7.2 146.69,79.3 145.783,78.393 142.375,78.393 142.1,78.118 ; D6.2@158.754,67.54 147.46,67.54 141.8,73.2 141.8,77.818 142.1,78.118 ; D8.2 157.989,113.989 ; U6.4 224.165,101.795 224.165,114.835 222.3,116.7 168.593,116.7 162.099,122 159.8,122 157.039,119.239 157.039,114.939 157.989,113.989 ; 142.1,78.118 142.1,98.1 157.989,113.989
Emitter1: Q2.1 R23.2 U4.19 | length 29.3
  Top Layer w0.203: v1(171.578,82.335) 172.25,83.007 U4.19
  Top Layer w0.508: R23.2 165.919,64.37 166.244,64.695 Q2.1 v1(166.244,66.195)
  Bottom Layer w0.203: v1(166.244,66.195) 161.4,71.039 161.4,72.157 v1@171.567,82.323
Emitter2_3: Q4.1 R25.2 U4.20 | length 43.2
  Top Layer w0.203: 149.6,86.948 162,74.548 v1(162,71.75) ; v1(172.05,81.8) 172.75,82.5 U4.20
  Top Layer w0.508: R25.2 148.7,86.165 148.721,86.186 148.838,86.186 149.6,86.948 149.6,89.869 149.554,89.915 Q4.1
  Bottom Layer w0.203: v1(162,71.75) v1(172.05,81.8)
Emitter4: Q3.1 R24.2 U4.39 | length 25.8
  Top Layer w0.203: U4.39 v1(173.75,93.25)
  Top Layer w0.508: R24.2 166.019,109.73 166.344,110.055 Q3.1 v1(166.344,111.63)
  Bottom Layer w0.203: v1(166.344,111.63) 166.344,103.906 173.75,96.5 v1(173.75,93.25)
EN_Left: U1.1 U4.14 | length 23.1
  Top Layer w0.203: U4.14 169.75,82.75 173.1,79.4 177.2,79.4 177.9,80.1 181.4,80.1 182.806,78.694 182.806,75.856 181.675,74.725 U1.1
EN_Right: U3.1 U4.28 | length 30.6
  Top Layer w0.152: U4.28@175.401,87.751 176.705,87.751 176.735,87.721 180.002,87.721 180.031,87.75 v1(180.75,87.75) ; U3.1 181.725,110.601 181.874,110.75 v1(182.75,110.75)
  Bottom Layer w0.203: v1(180.75,87.75) 180.75,97.25 182.75,99.25 v1(182.75,110.75)
GND: C3.2 C4.2 C5.2 C6.2 C9.1 C10.2 C11.2 C12.1 C13.1 C14.1 C15.1 C16.1 C17.1 C18.2 C19.1 C20.1 C21.2 C22.2 C23.2 C24.2 C25.2 C26.2 C27.2 C28.1 C29.1 C30.2 C31.2 C32.2 C33.2 C34.2 C36.2 D12.2 J1.6 J1.7 J1.8 J2.6 J2.7 J2.8 J3.1 J3.12 J3.S1 J3.S2 J3.S3 J3.S4 J3.S5 J3.S6 J4.2 P1.4 pad.2@144.037,74.967 pad.2@144.037,103.033 pad.2@153.891,62.689 pad.2@154.045,115.287 Q2.2 Q3.2 Q4.2 R1.1 R2.1 R3.2 R5.2 R7.1 R8.1 R9.1 R15.1 R16.1 R18.1 R23.1 R24.1 R25.1 R26.1 R27.1 R28.1 R29.1 R32.1 SW1.2 SW2.2 SW4.3 U1.9 U1.15 U1.16 U1.17 U2.2 U3.9 U3.15 U3.16 U3.17 U4.8 U4.23 U4.35 U4.47 U4.49 U5.3 U6.1 U9.5 U9.10 U9.12 X322525MOB4SI.2 X322525MOB4SI.4 | length 86.8
  Top Layer w0.203: U9.5 154.548,88.073 154.847,88.073 155.274,88.5 156.099,88.5 ; U9.12 156.882,89.457 156.731,89.457 156.099,88.826 156.099,88.5 ; v1(157.7,88.2) 157.4,88.5 U9.10 156.099,88.5 ; U4.8 169.45,88.25 v2(169.8,87.9) ; U4.47 169.75,91.25 v2(169.8,91.2) ; v2(174.2,86.8) 174.25,86.75 U4.23 ; v2(174.2,91.2) 174.25,91.25 U4.35
  Top Layer w0.305: U1.9 177.125,69.752 177.323,69.95 v2(177.45,69.95) ; U3.9 177.175,105.852 177.373,106.05 v2(177.5,106.05) ; U1.15 181.025,69.752 181.223,69.95 v2(181.35,69.95) 181.477,69.95 181.675,69.752 U1.16 ; U3.15 181.075,105.852 181.273,106.05 v2(181.4,106.05) 181.527,106.05 181.725,105.852 U3.16
  Top Layer w0.508: v1(146.6,86) 147.279,86 147.3,86.021 R25.1 ; Q4.2 149.654,91.815 149.7,91.861 v1(149.7,92.6) ; C15.1 149.499,83.897 v1(149.975,84.426) ; v1(151.362,79.039) R28.1 ; R27.1 v1(152.748,100.209) ; v1(157.3,93.7) 157.302,93.071 C26.2 C25.2 ; R18.1 v1(158.1,85.2) ; SW4.3 160.55,95.4 161.15,96 v1(161.2,96) ; v1(162.394,66.77) C12.1 ; v1(162.441,61.139) R26.1@162.542,60.507 ; v1(162.494,112.13) C16.1 ; R29.1@162.499,117.825 162.538,117.825 162.6,117.887 v1(162.6,118.5) ; R23.1 C13.1 ; R24.1 C17.1 ; v1(164.8,101.8) 165.9,101.8 U5.3 ; SW1.2 166.404,83.65 166.5,83.554 v1(166.5,82.9) ; Q2.2 168.144,64.716 168.19,64.67 v1(168.894,64.67) ; Q3.2 168.244,110.076 168.29,110.03 v1(168.994,110.03) ; J1.6 v1(173.4,68.8) 173.4,68.55 174.45,67.5 J1.8 ; J2.6 v1(173.5,104.9) 173.5,104.6 174.5,103.6 J2.8 ; v1(174.475,82.05) 175.179,82.05 175.2,82.029 R16.1 ; J1.7 175.05,75.1 175.396,75.446 175.396,76.696 v1(176.4,77.7) R1.1 ; J2.7 175.1,111.2 176.288,112.388 176.288,112.938 177.171,113.821 177.3,113.821 v1(177.3,114.5) ; C9.1 v1(177.4,83.2) ; C23.2 v1(177.4,84.4) ; v1(177.1,63.2) C3.2 ; v1(177.118,99.318) 177.118,100.068 C6.2 ; v1(177.75,93.25) 177.829,93.171 177.829,92.371 C22.2 ; v1(178.3,63.2) C4.2 ; v1(178.3,99.3) 178.3,100.05 C5.2 ; R7.1 178.379,113.8 178.4,113.821 v1(178.4,114.5) ; R3.2 v1(179.4,78.4) ; R5.2 179.479,113.8 179.5,113.821 v1(179.5,114.5) ; P1.4 212.959,91.679 213.244,91.679 213.315,91.75 C36.2 ; v1(214.592,78.32) 215.28,78.32 R32.1 ; v1(214.6,75.3) R15.1 ; J3.S3@218.888,72.918 J3.S3 ; v1(221.575,64.925) 222.275,64.925 C34.2 ; v1(222.7,70.35) SW2.2
  Top Layer w0.635: C15.1 C14.1 ; X322525MOB4SI.2 162.307,88.017 162.307,87.193 162.8,86.7 C18.2 v1(162.8,85.7) ; C12.1 C13.1 ; C16.1 C17.1 ; X322525MOB4SI.4@164.058,90.883 163.775,90.6 X322525MOB4SI.4 163.975,90.3 v1(165.3,90.3) C24.2 C21.2 C11.2 v1(164.2,93.7) ; v1(164.6,85.4) C19.1 C27.2 C10.2
  other v1: 206.5,94.7 207.3,94.7 208.1,94.7 217.4,94.7 218.2,94.7 219,94.7 219.8,94.7 220.6,94.7 206.1,95.3 206.9,95.3 207.7,95.3 208.5,95.3 217,95.3 217.8,95.3 218.6,95.3 219.4,95.3 220.2,95.3 221,95.3 206.5,95.9 207.3,95.9 208.1,95.9 206.1,96.5 206.9,96.5 207.7,96.5 208.5,96.5 206.5,97 207.3,97 208.1,97 206.1,97.6 206.9,97.6 207.7,97.6 208.5,97.6 206.5,98.2 207.3,98.2 206.1,98.8 206.9,98.8 207.7,98.8 206.5,99.4 207.3,99.4 206.1,100 206.9,100 206.5,100.6 207.3,100.6 206.1,101.2 206.9,101.2 207.7,101.2 206.5,101.8 207.3,101.8 206.1,102.4 206.9,102.4 207.7,102.4 206.5,103 207.3,103 206.1,103.6 206.9,103.6 207.7,103.6 221.6,104.9 222.4,104.9 222,105.4 221.6,105.9 222.4,105.9 222,106.4 221.6,107 222.4,107 222,107.6 221.6,108.2 222.4,108.2 222,108.7 221.6,109.3 222.4,109.3 216.7,110.5 217.5,110.5 218.3,110.5 219.1,110.5 219.9,110.5 220.7,110.5 221.5,110.5 222.3,110.5 217.1,111 217.9,111 218.7,111 219.5,111 220.3,111 221.1,111 221.9,111 216.7,111.6 217.5,111.6 218.3,111.6 219.1,111.6 219.9,111.6 220.7,111.6 221.5,111.6 222.3,111.6 217.1,112.2 217.9,112.2 218.7,112.2 219.5,112.2 220.3,112.2 221.1,112.2 221.9,112.2 216.7,112.8 217.5,112.8 218.3,112.8 219.1,112.8 219.9,112.8 220.7,112.8 221.5,112.8 222.3,112.8 217.1,113.3 217.9,113.3 218.7,113.3 219.5,113.3 220.3,113.3 221.1,113.3 221.9,113.3 216.7,113.9 217.5,113.9 218.3,113.9 219.1,113.9 219.9,113.9 220.7,113.9 221.5,113.9 222.3,113.9
  other v2: 178.75,69.95 180.05,69.95 177.45,71.3 178.75,71.3 180.05,71.3 181.35,71.3 177.45,72.65 178.75,72.65 180.05,72.65 181.35,72.65 169.8,86.8 170.9,86.8 172,86.8 173.1,86.8 170.9,87.9 172,87.9 173.1,87.9 174.2,87.9 169.8,89 170.9,89 172,89 173.1,89 174.2,89 169.8,90.1 170.9,90.1 172,90.1 173.1,90.1 174.2,90.1 170.9,91.2 172,91.2 173.1,91.2 178.8,106.05 180.1,106.05 177.5,107.4 178.8,107.4 180.1,107.4 181.4,107.4 177.5,108.75 178.8,108.75 180.1,108.75 181.4,108.75
IMU_INT: U4.45 U9.11 | length 22.1
  Top Layer w0.203: v1(168.6,96.9) 170.75,94.75 U4.45
  Top Layer w0.305: U9.11 v1(157.65,89)
  Bottom Layer w0.203: v1@157.65,89.1 161.6,93.05 167.875,93.05 168.6,93.775 v1(168.6,96.9)
Left_EncoderA: J1.4 U4.12 | length 17.2
  Top Layer w0.203: U4.12 168.6,73.95 171.75,70.8 J1.4
Left_EncoderB: J1.5 U4.11 | length 19.6
  Top Layer w0.203: U4.11 168.591,86.741 168.241,86.741 167.8,86.3 167.8,73.75 171.75,69.8 J1.5
M1_Left: J1.1 U1.8
M1_Right: J2.1 U3.8
M2_Left: J1.2 U1.10
M2_Right: J2.2 U3.10
MCU_I2C1_SCL: R10.1 U4.42 U9.4 | length 30.5
  Top Layer w0.203: R10.1 153.013,88.513 153.013,89.337 v1(153.025,89.35) ; v1(169.65,98.3) 172.25,95.7 U4.42
  Top Layer w0.254: R10.1 U9.4
  Bottom Layer w0.203: v1(153.025,89.35) 156.275,89.35 ; 156.275,89.45 166.2,99.375 168.575,99.375 v1(169.65,98.3)
MCU_I2C1_SDA: R14.1 U4.43 U9.6 | length 29.4
  Top Layer w0.203: v1(168.85,98.3) 171.75,95.4 U4.43
  Top Layer w0.254: R14.1 154.875,87.4 ; v1(154.725,86.85) 154.756,86.881 154.756,87.281 154.875,87.4 ; U9.6 155.2,87.725 154.875,87.4
  Bottom Layer w0.203: v1(154.725,86.85) v1@154.725,86.896 ; v1@154.725,86.996 166.61,98.88 168.27,98.88 v1(168.85,98.3)
MCU_LED: D5.1 U4.21 | length 5.9
  Top Layer w0.203: U4.21 173.25,82.43 174.832,80.848 174.882,80.848 175.18,80.55 D5.1
MCU_LED_K: D5.2 R16.2 | length 1.5
  Top Layer w0.508: R16.2 176.6,80.548 ccw(c176.668,80.548) D5.2
MCU_OSC_IN: C11.1 U4.5 X322525MOB4SI.1 | length 9.6
  Top Layer w0.203: X322525MOB4SI.1 162.025,90.4 163.025,89.4 167.1,89.4 167.45,89.75 U4.5
  Top Layer w0.635: X322525MOB4SI.1@162.011,90.487 162.081,90.556 162.081,91.781 162.692,92.392 162.792,92.392 162.8,92.4 C11.1
MCU_OSC_OUT: C18.1 U4.6 X322525MOB4SI.3 | length 7.1
  Top Layer w0.203: X322525MOB4SI.3 164.175,88.7 167.372,88.7 167.922,89.25 U4.6
  Top Layer w0.635: X322525MOB4SI.3 164,88.075 164,86.9 164.2,86.7 C18.1
MCU_USB_D_N: J3.5 J3.8 U4.32 | length 51.6
  Top Layer w0.203: U4.32 181.75,89.75 v1(182.5,89) ; v1(216,76.4) 217.186,76.4 217.286,76.3 J3.5 218.733,76.333 219.233,76.333 219.5,76.6 219.5,77.5 219.233,77.767 218.733,77.767 J3.8
  Bottom Layer w0.203: v1(182.5,89) 192.875,89 205.175,76.7 215.633,76.7 215.933,76.4 v1(216,76.4)
MCU_USB_D_P: J3.6 J3.7 U4.33 | length 49.2
  Top Layer w0.203: U4.33 182.05,90.25 v1(182.5,89.8) ; v1(216,77.3) J3.7 J3.6
  Bottom Layer w0.203: v1(182.5,89.8) 182.567,89.8 182.767,89.6 192.85,89.6 205.207,77.243 215.943,77.243 v1(216,77.3)
NetC1_1: C1.1 U1.14 | length 5.5
  Top Layer w0.305: U1.14 180.448,68.327 180.448,67.652 182.1,66 182.1,64.7 181.4,64 C1.1
NetC1_2: C1.2 U1.13 | length 3.7
  Top Layer w0.305: U1.13 179.754,68.371 179.754,67.446 181.057,66.143 181.057,65.573 181.229,65.4 C1.2
NetC7_1: C7.1 U3.14 | length 5.5
  Top Layer w0.305: U3.14 180.498,104.427 180.498,103.702 182.1,102.1 182.1,100.75 181.45,100.1 C7.1
NetC7_2: C7.2 U3.13 | length 3.7
  Top Layer w0.305: U3.13 179.779,104.496 179.779,103.521 181.1,102.2 181.1,101.673 181.273,101.5 C7.2
NetC9_2: C9.2 U4.22 | length 3.2
  Top Layer w0.203: U4.22 173.75,84.25 174.689,83.311 175.089,83.311 C9.2
NetC29_2: C29.2 D1.1 Q1.3 R30.1 U2.1
NetD6_1: D6.1 R11.2 | length 4.9
  Top Layer w0.508: D6.1@158.794,65 162.524,65 163.173,65.649 163.173,65.749 163.194,65.77 R11.2
NetD7_1: D7.1 D11.2 | length 21.3
  Top Layer w0.508: D7.1 145,88.918 143.4,90.518 143.4,97.8 144.3,98.7 D11.2
NetD8_1: D8.1 R20.2 | length 5.1
  Top Layer w0.508: D8.1@158.595,110.46 162.69,110.46 163.273,111.043 163.273,111.109 163.294,111.13 R20.2
NetD11_1: D11.1 R21.1 R22.1 | length 10.8
  Top Layer w0.508: D11.1 145,90.665 147.3,88.365 R21.1 R22.1
NetD12_1: D12.1 R31.1 | length 1.5
  Top Layer w0.508: D12.1 220.45,108.595 R31.1
NetJ3_3: J3.3 R15.2 | length 2
  Top Layer w0.203: R15.2 J3.3
NetJ3_9: J3.9 R32.2 | length 2
  Top Layer w0.203: R32.2 J3.9
NetQ2_3: Q2.3 R11.1 | length 7.9
  Top Layer w0.508: R11.1 163.394,64.37 163.415,64.349 163.415,63.956 163.801,63.57 166.394,63.57 167.194,64.37 Q2.3
NetQ3_3: Q3.3 R20.1 | length 7.9
  Top Layer w0.508: R20.1 163.494,109.73 163.515,109.709 163.515,109.316 163.901,108.93 166.494,108.93 167.294,109.73 Q3.3
NetQ4_3: Q4.3 R21.2 R22.2 | length 4.5
  Top Layer w0.508: Q4.3 146.9,90.065 148.579,88.386 148.679,88.386 148.7,88.365 R21.2 R22.2
NetR1_2: R1.2 U1.6 | length 2.2
  Top Layer w0.203: R1.2 178.3,74.85 178.425,74.725 U1.6
NetR2_2: R2.2 U1.7 | length 2.4
  Top Layer w0.203: R2.2 177.3,76.3 177.473,76.127 177.473,76.027 177.775,75.725 U1.7
NetR3_1: R3.1 R4.2 U1.5 | length 5.1
  Top Layer w0.203: U1.5 179.075,76.075 179.3,76.3 R3.1 179.5,76.3 180.2,77 180.8,77 181.5,77.7 R4.2
NetR4_1: R4.1 U1.3 | length 2.7
  Top Layer w0.203: U1.3 180.455,74.28 180.455,75.255 181.5,76.3 R4.1
NetR5_1: R5.1 R6.2 U3.5 | length 5.1
  Top Layer w0.203: U3.5 179.125,112.075 179.177,112.126 179.177,112.227 179.35,112.4 179.55,112.4 180.25,113.1 180.85,113.1 181.55,113.8 R6.2
NetR6_1: R6.1 U3.3 | length 2.7
  Top Layer w0.203: U3.3 180.548,110.423 180.548,111.298 181.377,112.127 181.377,112.227 181.55,112.4 R6.1
NetR7_2: R7.2 U3.6 | length 2.2
  Top Layer w0.203: R7.2 178.35,110.95 178.475,110.825 U3.6
NetR8_2: R8.2 U3.7 | length 2.4
  Top Layer w0.203: R8.2 177.35,112.4 177.523,112.227 177.523,112.127 177.708,111.942 177.708,110.417 U3.7
NetR12_2: R12.2 U1.4 | length 2.5
  Top Layer w0.203: U1.4 179.725,75.625 180.4,76.3 R12.2
NetR13_2: R13.2 U3.4 | length 2.5
  Top Layer w0.203: U3.4 179.898,110.423 179.898,111.786 180.277,112.164 180.277,112.227 180.45,112.4 R13.2
NetR17_1: R17.1 SW4.4 | length 2.2
  Top Layer w0.508: R17.1 165.321,93.721 165.321,94.471 166.25,95.4 SW4.4
NetR17_2: R17.2 U4.44 | length 12.9
  Top Layer w0.203: v1(168.025,98.3) 171.25,95.075 U4.44
  Top Layer w0.305: R17.2 v1(167.5,93.7)
  Bottom Layer w0.203: v1(167.5,93.7) 168.025,94.225 v1(168.025,98.3)
NetR18_2: R18.2 U9.7 | length 2.9
  Top Layer w0.203: U9.7 155.7,87.2 155.4,86.9 155.4,85.9 156,85.3 R18.2
NetR19_2: R19.2 U9.8 | length 1.6
  Top Layer w0.203: R19.2 156,86.9 156.2,87.1 U9.8
NetR30_2: R30.2 U2.3 | length 10.5
  Top Layer w0.508: v1(207.7,100) 208.929,100 208.95,100.021 R30.2 ; U2.3 214.1,102.7 214.6,102.2 v1(214.6,102.1)
  Bottom Layer w0.508: v1(207.7,100) 212.5,100 v1(214.6,102.1)
PH_Left: U1.2 U4.13 | length 23.4
  Top Layer w0.203: U4.13 169.265,85.585 169.265,82.235 172.6,78.9 177.4,78.9 178.067,79.567 181.233,79.567 182.4,78.4 182.4,76.199 181.148,74.947 181.148,74.323 U1.2
PH_Right: U3.2 U4.27 | length 33
  Top Layer w0.152: U4.27 178.406,87.25 178.656,87 v1(180,87)
  Top Layer w0.203: U3.2 181.173,110.398 181.173,111.173 181.5,111.5 v1(182.75,111.5)
  Bottom Layer w0.203: v1(180,87) 180,97.932 181.955,99.887 181.955,110.739 182.715,111.5 v1(182.75,111.5)
PROG1: C34.1 SW2.4 U4.30 | length 59.1
  Top Layer w0.203: U4.30 176.686,88.75 176.741,88.805 181.115,88.805 181.474,88.445 v1(181.5,88.445) ; v1(222.68,66.65) SW2.4
  Top Layer w0.508: SW2.4 223.629,66.65 223.725,66.554 C34.1
  Bottom Layer w0.203: v1(181.5,88.445) 181.555,88.445 203.35,66.65 v1(222.68,66.65)
Receiver1: D9.1 R26.2 U4.15 | length 50.1
  Top Layer w0.203: U4.15 170.25,84.33 170.5,84.08 v1(170.5,84)
  Top Layer w0.508: D9.1 R26.2@162.639,59.073
  Bottom Layer w0.203: D9.1 159.42,59.235 159.42,59.68 158.4,60.7 158.4,61.2 149.5,70.1 149.5,75.5 151.5,77.5 164,77.5 v1(170.5,84)
Receiver2: D10.1 R27.2 U4.16 | length 44.8
  Top Layer w0.203: v1(170.615,83.172) 171.055,83.611 171.055,84.23 170.75,84.535 U4.16
  Top Layer w0.508: D10.1 149.335,100.809 R27.2
  Bottom Layer w0.203: D10.1 167.921,100.814 170.325,98.41 170.325,93.475 168.625,91.775 168.625,86.828 171.055,84.398 171.055,83.611 v1(170.615,83.172)
Receiver3: D16.1 R28.2 U4.17 | length 28.9
  Top Layer w0.203: U4.17 171.25,84.867 171.5,84.617 v1(171.5,83.25)
  Top Layer w0.508: D16.1 151.122,75.582 R28.2
  Bottom Layer w0.203: D16.1 151.143,75.499 163.749,75.499 v1(171.5,83.25)
Receiver4: D15.1 R29.2 U4.29 | length 44.7
  Top Layer w0.152: U4.29 v1(177.5,88.25)
  Top Layer w0.508: D15.1@159.637,116.861 R29.2
  Bottom Layer w0.203: D15.1@160.182,116.112 D15.1 159.479,116.763 159.705,116.537 159.705,115.795 162.389,113.111 166.989,113.111 169.7,110.4 169.7,102.05 175,96.75 175,90.75 v1(177.5,88.25)
Reset: C10.1 SW1.4 U4.7 | length 11
  Top Layer w0.203: SW1.4 165.6,80.75 165.6,84.1 166,84.5 166,87 166.477,87.477 166.7,87.7 166.7,87.877 166.923,88.1 167.5,88.1 168.141,88.741 168.591,88.741 U4.7
RGB1: U4.46 U5.4 | length 14.7
  Top Layer w0.203: U5.4 166.25,105.15 167.4,104 167.4,95.8 170.25,92.95 U4.46
Right_EncoderA: J2.4 U4.26 | length 29.6
  Top Layer w0.152: U4.26@175.415,86.735 U4.26 176.426,86.75 176.926,86.25 v1(179.25,86.25)
  Top Layer w0.203: v1(171,107) 171.05,106.95 172.225,106.95 J2.4
  Bottom Layer w0.203: v1(171,107) 172,106 172,102.75 179.25,95.5 v1(179.25,86.25)
Right_EncoderB: J2.5 U4.25 | length 28.3
  Top Layer w0.152: U4.25 176.103,86.25 176.853,85.5 v1(178.5,85.5)
  Top Layer w0.203: v1(171,106) 171.05,105.95 172.225,105.95 J2.5
  Bottom Layer w0.203: v1(171,106) 171,102.5 178.5,95 v1(178.5,85.5)
SWDCLK: P1.3 U4.37 | length 40.7
  Top Layer w0.203: U4.37 174.75,92.548 174.772,92.57 175.07,92.57 176.309,93.809 181.191,93.809 v1(182.5,92.5)
  Bottom Layer w0.203: v1(182.5,92.5) 209.32,92.5 P1.3
SWIO: P1.2 U4.34 | length 41.9
  Top Layer w0.203: U4.34 v1(182.5,90.75)
  Bottom Layer w0.203: v1(182.5,90.75) 206.55,90.75 209.8,87.5 213.86,87.5 P1.2
VBAT: C2.1 C3.1 C4.1 C5.1 C6.1 C8.1 C30.1 C31.1 J4.1 U1.11 U3.11 U6.3
VBUS: D1.2 J3.2 J3.11 Q1.1 R9.2 | length 29.5
  Top Layer w0.508: 217.6,79.4 J3.11 ; J3.2 218.706,74.706 219.208,74.706 220.3,75.798 220.3,78.302 219.208,79.394 J3.11@218.706,79.394
  Top Layer w1.016: 216.5,80.5 217.6,79.4
  Top Layer w1.27: D1.2 214.788,95.112 220,89.9 220,87.157 216.5,83.657 216.5,80.5
VCP: C2.2 U1.12 | length 5.3
  Top Layer w0.305: U1.12 179.075,67.125 180.3,65.9 180.3,64.7 179.6,64 C2.2
VCP2: C8.2 U3.12 | length 5.3
  Top Layer w0.305: U3.12 179.125,103.275 180.3,102.1 180.3,100.75 179.65,100.1 C8.2
pads on no net: J3. J3.4 J3.10 SW1.1 SW1.3 SW2.1 SW2.3 SW4.1 U2.4 U4.2 U4.3 U4.4 U4.10 U4.18 U4.31 U4.38 U4.40 U4.41 U5.2 U9.2 U9.3 U9.9 U9.13 U9.15 U9.16

## Polygon pours and split planes (outlines as drawn)
VBUS on Top Layer "NONET_L-01_P-001" (solid, remove dead copper, pour order 2): 209.95,99.675 209.95,95.375 215.45,95.375 215.45,99.775 212.95,99.775 212.95,96.475 210.75,96.475 210.75,99.675
M2_Right on Top Layer "NONET_L-01_P-001" (solid, remove dead copper, pour order 4): 178.075,105.25 178.075,102.8 175.85,102.8 175.85,105.825 173.175,108.5 171.35,108.5 171.35,109.3 176.8,109.3 176.8,105.25
M1_Right on Top Layer "NONET_L-01_P-001" (solid, remove dead copper, pour order 9): 177.45,109.5 171.35,109.5 171.35,110.4 175.75,110.4 176.45,111.1 177.45,111.1
M2_Left on Top Layer "NONET_L-01_P-001" (solid, remove dead copper, pour order 10): 178.025,69.15 178.025,66.7 175.8,66.7 175.8,69.725 173.125,72.4 171.3,72.4 171.3,73.2 176.75,73.2 176.75,69.15
M1_Left on Top Layer "NONET_L-01_P-001" (solid, remove dead copper, pour order 12): 177.4,73.4 171.3,73.4 171.3,74.3 175.7,74.3 176.4,75 177.4,75
VBAT on Top Layer "Top Layer-VBAT" (solid, remove dead copper, pour order 13): 199.75,108 213.325,108 214.95,106.375 214.95,102.375 217.55,102.375 217.55,103.775 217.15,104.175 217.15,107.475 213.95,110.675 213.95,112.575 197.325,112.575 183.25,98.5 176.5,98.5 176.5,101.05 180.15,101.05 180.15,101.925 178.85,103.225 178.85,105.25 178.2,105.25 178.2,103.1 177.9,102.8 173.9,102.8 173.9,95 182,95 185,92 185,63.5 184.25,62.75 176.45,62.75 176.45,64.95 180.1,64.95 180.1,65.825 178.8,67.125 178.8,69.15 178.15,69.15 178.15,67 177.85,66.7 173.9,66.7 173.9,59 186,59 188.5,61.5 188.5,96.75
3V3 on Top Layer "Top Layer-3V3" (solid, remove dead copper, pour order 15): 209.95,101.975 211.15,101.975 211.15,104.275 212.55,104.275 212.55,106.675 198.175,106.675 188.5,97 188.5,61.5 186,59 185,59 185,121 157.121,121 144,107.879 144,70.121 160.371,53.75 187.25,53.75 192.25,58.75 192.25,93.75 202.825,104.325 209.95,104.325
NetC29_2 on Top Layer "NONET_L-01_P-001" (solid, remove dead copper, pour order 19): 210.85,96.475 210.85,99.475 210.65,99.675 209.95,99.675 209.95,101.775 210.85,101.775 211.25,102.175 211.25,104.175 212.55,104.175 212.55,102.375 212.85,102.075 212.85,96.475
5V on Top Layer "NONET_L-01_P-001" (solid, pour order 31): 217.45,96.075 217.45,101.2 218.55,102.3 218.55,107.675 220.85,107.675 220.85,96.075
GND on Top Layer "NONET_L-01_P-001" (solid, remove dead copper, pour order 35): 205.575,114.55 223,114.55 223,93.925 205.575,93.925
GND on Top Layer "NONET_L-01_P-001" (solid, pour order 36): 217.6,82.2 224.5,82.2 224.5,71.9 217.6,71.9
GND on Bottom Layer "NONET_L-01_P-001" (solid, pour order 20): 161.5,129 225,129 225,49 161.5,49 137.5,73 137.5,105

## Keep-outs
Keep-Out Layer:
  rectangle: 183.36,53.184 205.36,87.184
  rectangle: 183.36,90.934 205.36,124.934

## Other copper
Top Layer:
  pour cut-out: 154,89.775 157.4,89.775 157.4,87.3 157.3,87.2 154,87.2

## Silkscreen, mask and mechanical layers (free items; w line width, h text height)
Top Overlay:
  circle w0.508: c157.1,83.1 r1.061